# Altium PCB breakout.PcbDoc
Units mm, origin at the board's own origin, x right, y up, seen from the top; angles counter-clockwise.
Board outline 25.91 x 34.92 mm, 2 copper layers (Top Layer, Bottom Layer), stack 0.325 mm thick; 39 components, 49 nets, 215 pads, 52 vias.
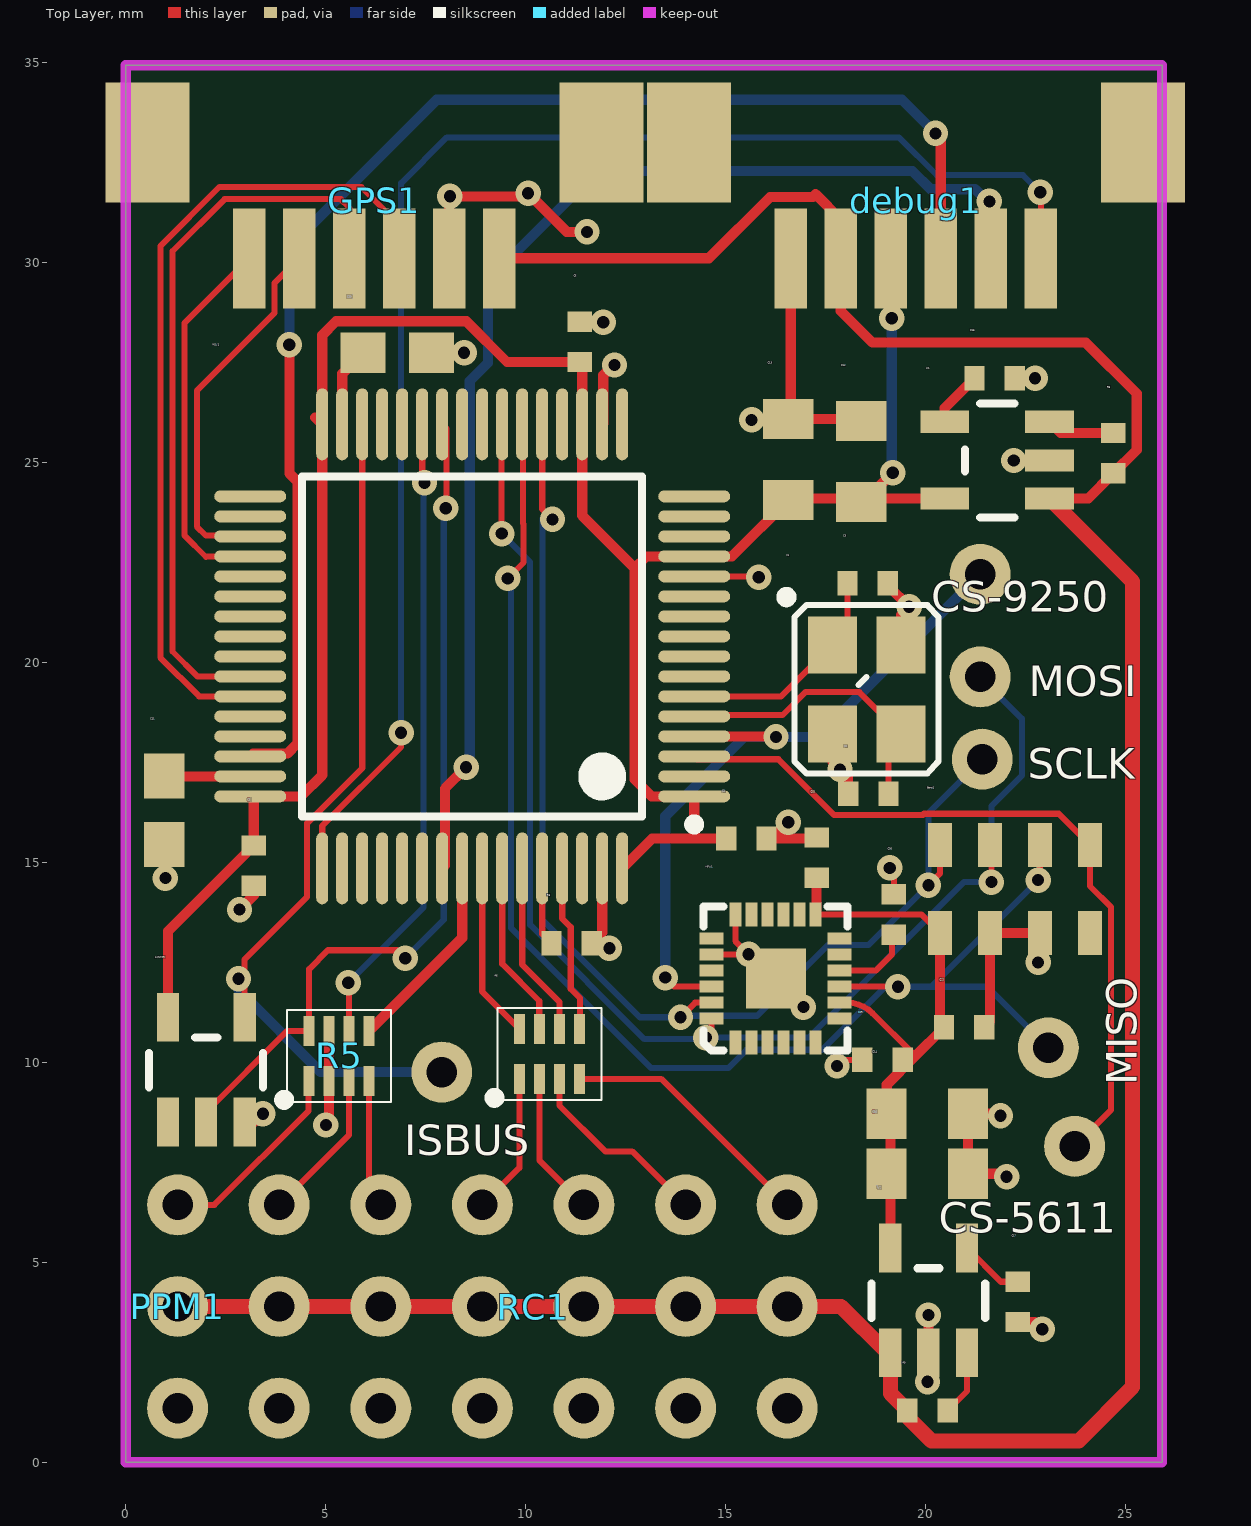
[diagram p0: Top Layer view]
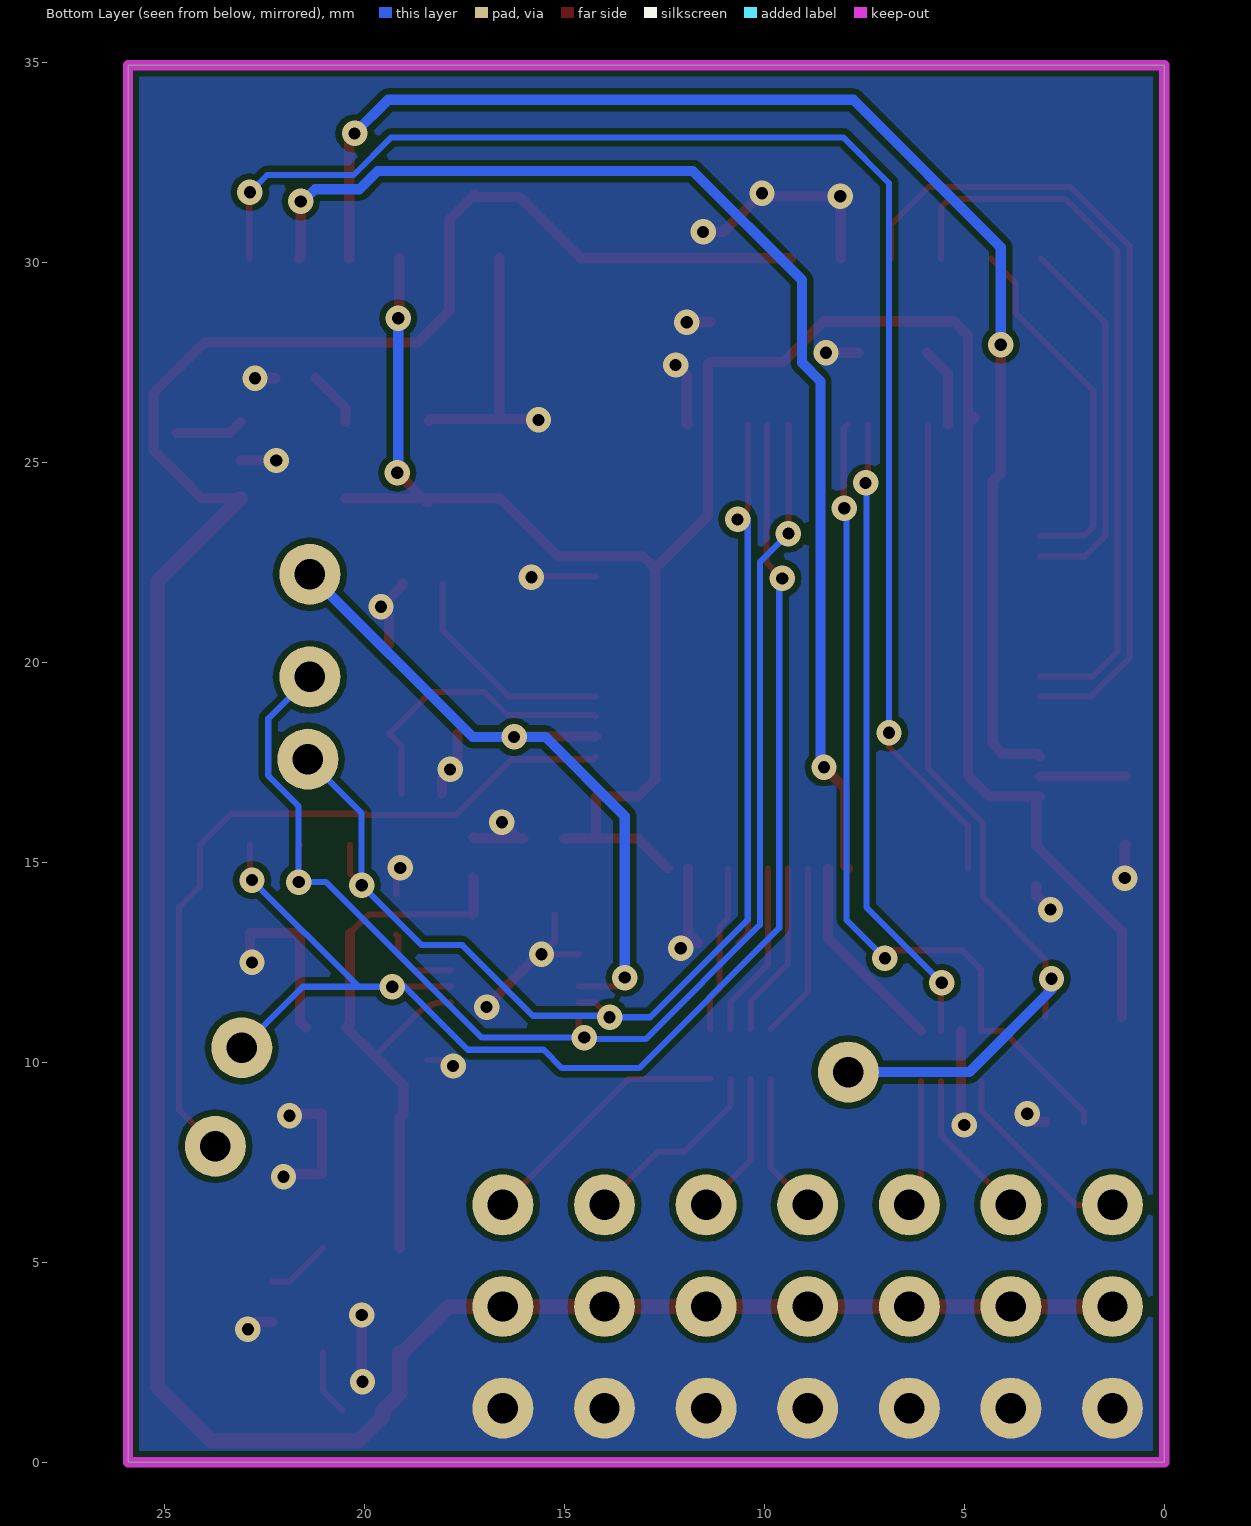
[diagram p1: Bottom Layer view, seen from below]

## Layer stack, top to bottom
Top Solder: solder mask 0.0102, Solder Resist, Dk 3.5
Top Layer: signal copper 0.0356
Dielectric 1: core 0.254, FR-4, Dk 4.2
Bottom Layer: signal copper 0.0356
Bottom Solder: solder mask 0.0102, Solder Resist, Dk 3.5

## Board outline
0,0 0,34.925 25.908,34.925 25.908,0

## Design rules (kind name [scope] priority, off if disabled: settings)
Clearance [All] p1: gap=0.152
DiffPairsRouting [All] p1: maxlimit=0.254 minlimit=0.254 mostfreqgap=0.254 toplayer_minwidth=0.152 toplayer_maxwidth=0.381 toplayer_prefwidth=0.381 bottomlayer_minwidth=0.152 bottomlayer_maxwidth=0.381 bottomlayer_prefwidth=0.381 maxuncoupledlength=12.7
MinimumSolderMaskSliver [All] p1 off: minsoldermaskwidth=0.254
PlaneConnect [All] p1: planeconnectstyle=Direct reliefexpansion=0.508 reliefentries=4 reliefconductorwidth=0.254 reliefairgap=0.254
PolygonConnect [All] p1: connectstyle=Direct reliefconductorwidth=0.254 reliefentries=4 polygonreliefangle="90 Angle" airgapwidth=0.254
RoomDefinition sensor [InComponentClass('sensor')] p1 off: confinementstyle=ConfineIn formatcopy=TRUE lockcomponents=FALSE outline -101.6,-52.07 -50.8,-52.07 -50.8,-26.67 -101.6,-26.67
RoomDefinition mcu [InComponentClass('mcu')] p2 off: confinementstyle=ConfineIn formatcopy=TRUE lockcomponents=FALSE outline -101.6,-52.07 -50.8,-52.07 -50.8,-26.67 -101.6,-26.67
RoutingVias [All] p1: holewidth=0.305 width=0.635 viastyle="Through Hole" minholewidth=0.305 minwidth=0.635 maxholewidth=0.711 maxwidth=5.08
SilkToBoardRegionClearance [All] p1 off:
SilkToSilkClearance [All] p1 off: silktosilkclearance=0.254
SilkToSolderMaskClearance [IsPad] p1 off: minsilkscreentomaskgap=0.254 clearancetoexposedcopper=TRUE
SolderMaskExpansion [All] p1: expansion=0.102
UnpouredPolygon [All] p1: allowunpoured=FALSE
Width [All] p1: maxlimit=2.159 minlimit=0.152 preferedwidth=0.152
23 further rules are at their usual default settings.

## Classes and differential pairs
component class sensor: Baro1 C12 C13 C14 C15 C16 C17 C27 C29 C30 C31 CS-5611 CS-9250 GPS1 MISO MOSI MPU1 R8 R9 SCLK U1 U2
component class mcu: C2 C3 C4 C5 C6 C10 C11 debug1 ISBUS MCU1 PPM1 R3 R5 R6 RC1 schmitt X1

## Components (designator, comment, footprint, x,y, rotation, side; value= is the part's Value field where it differs from the comment)
Baro1 "MS5611" MS5611 24.105,13.233 r90 top
C2 "22pF" 0402 18.567,16.713 r180 top
C3 "22pF" 0402 18.542,21.971 r0 top
C4 "0.1uF * 3" 0402 15.519,15.596 r180 top
C5 "1n" 0402 11.354,28.016 r270 top
C6 "1n" 0402 3.2,14.91 r90 top
C10 "2.2uF" 0603 6.782,27.737 r0 top
C11 "2.2uF" 0603 0.965,16.307 r270 top
C12 "22uF" 0805 18.39,25.019 r90 top
C13 "22uF" 0805 16.561,25.07 r90 top
C14 "22uF" 0805 20.041,8.712 r0 top
C15 "22uF" 0805 20.041,7.214 r0 top
C16 "0.1uf" 0402 21.717,27.102 r0 top
C17 "0.1uF" 0402 22.301,4.013 r270 top
C27 "0.1uF" 0402 20.955,10.871 r0 top
C29 "10nF" 0402 18.923,10.058 r180 top
C30 "0.1uF" 0402 19.202,13.69 r90 top
C31 "0.1uF" 0402 17.272,15.113 r90 top
CS-5611 "TestPad" TestPad 23.724,7.899 r90 top
CS-9250 "TestPad" TestPad 21.361,22.2 r90 top
debug1 "debug" WFRSM125 19.126,30.099 r180 top
GPS1 "GPS" WFRSM125 5.588,30.099 r180 top
ISBUS "TestPad" TestPad 7.899,9.754 r90 top
MCU1 "STM32F103R8T6" LQFP64_N 8.661,20.396 r180 top
MISO "TestPad" TestPad 23.063,10.363 r90 top
MOSI "TestPad" TestPad 21.361,19.634 r90 top
MPU1 "MPU9250" MPU9250 15.24,10.49 r90 top
PPM1 "PPMIn" ServoConnector 1.295,1.354 r90 top
R3 "10k" 0402 11.151,12.979 r180 top
R5 "Res*4" 0402X4 5.334,10.16 r90 top
R6 "Res*4" 0402X4 10.592,10.211 r90 top
R8 "10k" 0402 24.689,25.222 r90 top
R9 "10k" 0402 20.041,1.295 r0 top
RC1 "RC" 6P 8.915,1.354 r90 top
schmitt "schmitt_sot23-5" SOT23-5 2.007,9.804 r0 top
SCLK "TestPad" TestPad 21.412,17.577 r180 top
U1 "V_REG_LDOSMD" SOT23-5 21.793,25.044 r90 top
U2 "V_REG_LDOSMD" SOT23-5 20.066,4.039 r0 top
X1 "8mhz" OSCILLATOR-3.2X2.5 18.517,19.329 r270 top

## Footprints (in the part's own frame and the unit in brackets; to place one, negate y for a bottom-side part, rotate by r counter-clockwise, add the part's x,y. Pads: shape width x height; smd on the part's side, far side on the other; paste and mask are expansions set on the pad)
6P [mil]
  round 60 hole 30: 1(200,200) 2(200,100) 3(200,0) 4(200,-100) 5(200,-200) 5V(100,200) 5V(100,-100) 5V(100,0) 5V(100,100) 5V(100,-300) 5V(100,-200) 6(200,-300) GND(0,200) GND(0,100) GND(0,0) GND(0,-100) GND(0,-200) GND(0,-300)
0402 [mil] "0402-RES"
  rect 20x24 smd: 1(-19.69,0) 2(20,0)
0402X4 [mm]
  rect 0.75x0.28 smd: 1(-0.625,0.75) 2(-0.625,0.25) 3(-0.625,-0.25) 4(-0.625,-0.75) 5(0.625,-0.75) 6(0.625,-0.25) 7(0.625,0.25) 8(0.625,0.75)
  silkscreen extent -1.22,-1.3 1.15,1.5
0603 [mil] "0603-RES"
  rect 44x40 smd: 1(-33.46,0) 2(34,0)
0805 [mm]
  rect 1x1.27 smd: 1(-1.016,0) 2(1.016,0)
  body extent -1.27,-0.76 1.27,0.76, height 0.8
LQFP64_N [mm]
  oval 1.8x0.3 smd: 1(-5.55,3.75) 2(-5.55,3.25) 3(-5.55,2.75) 4(-5.55,2.25) 5(-5.55,1.75) 6(-5.55,1.25) 7(-5.55,0.75) 8(-5.55,0.25) 9(-5.55,-0.25) 10(-5.55,-0.75) 11(-5.55,-1.25) 12(-5.55,-1.75) 13(-5.55,-2.25) 14(-5.55,-2.75) 15(-5.55,-3.25) 16(-5.55,-3.75) 33(5.55,-3.75) 34(5.55,-3.25) 35(5.55,-2.75) 36(5.55,-2.25) 37(5.55,-1.75) 38(5.55,-1.25) 39(5.55,-0.75) 40(5.55,-0.25) 41(5.55,0.25) 42(5.55,0.75) 43(5.55,1.25) 44(5.55,1.75) 45(5.55,2.25) 46(5.55,2.75) 47(5.55,3.25) 48(5.55,3.75)
  oval 0.3x1.8 smd: 17(-3.75,-5.55) 18(-3.25,-5.55) 19(-2.75,-5.55) 20(-2.25,-5.55) 21(-1.75,-5.55) 22(-1.25,-5.55) 23(-0.75,-5.55) 24(-0.25,-5.55) 25(0.25,-5.55) 26(0.75,-5.55) 27(1.25,-5.55) 28(1.75,-5.55) 29(2.25,-5.55) 30(2.75,-5.55) 31(3.25,-5.55) 32(3.75,-5.55) 49(3.75,5.55) 50(3.25,5.55) 51(2.75,5.55) 52(2.25,5.55) 53(1.75,5.55) 54(1.25,5.55) 55(0.75,5.55) 56(0.25,5.55) 57(-0.25,5.55) 58(-0.75,5.55) 59(-1.25,5.55) 60(-1.75,5.55) 61(-2.25,5.55) 62(-2.75,5.55) 63(-3.25,5.55) 64(-3.75,5.55)
  silkscreen extent -5.68,-4.25 4.25,4.57
MPU9250 [mm]
  rect 1.5x1.5 smd: 0(1.6,-1.016)
  rect 0.6x0.3 smd: 1(0,0) 2(0,-0.4) 3(0,-0.8) 4(0,-1.2) 5(0,-1.6) 6(0,-2) 13(3.2,-2) 14(3.2,-1.6) 15(3.2,-1.2) 16(3.2,-0.8) 17(3.2,-0.4) 18(3.2,0)
  rect 0.3x0.6 smd: 7(0.6,-2.6) 8(1,-2.6) 9(1.4,-2.6) 10(1.8,-2.6) 11(2.2,-2.6) 12(2.6,-2.6) 19(2.6,0.6) 20(2.2,0.6) 21(1.8,0.6) 22(1.4,0.6) 23(1,0.6) 24(0.6,0.6)
  silkscreen extent -0.2,-2.8 3.4,0.8, body extent 0.1,-2.51 3.1,0.48, height 1
MS5611 [mm]
  rect 1.1x0.6 smd: 1(0,3.75) 2(0,2.5) 3(0,1.25) 4(0,0) 5(2.2,0) 6(2.2,1.25) 7(2.2,2.5) 8(2.2,3.75)
  body extent -0.51,-0.51 2.67,4.32, height 1
OSCILLATOR-3.2X2.5 [mil] "OSCILLATOR-3.2X2.5"
  rect 56x48 smd: 1(-43.31,-33.46) 2(44,-33.46) 3(44,34) 4(-43.31,34)
  silkscreen extent -95,-83 83,71
ServoConnector [mil]
  round 60 hole 30: 1(0,0) 2(100,0) 3(200,0)
SOT23-5 [mil] "SOT23-5"
  rect 22x48 smd: 1(-37.4,-51.18) 2(0,-51.18) 3(38,-51.18) 4(38,52) 5(-37.4,52)
  silkscreen extent -56,-17 56,32
TestPad [mil]
  round 60 hole 30: 1(0,0)
WFRSM125 [mm]
  rect 0.81x2.5 smd: 1(-3.75,0) 2(-2.5,0) 3(-1.25,0) 4(0,0) 5(1.25,0) 6(2.5,0)
  rect 2.1x3 smd: shell(-6.3,-2.9) shell(5.05,-2.9)
  body extent -6.79,-3.82 5.46,0.38, height 3.4

## Part data
C2 C3 C4 C5 C6 C10 C11 C12 C13 C14 C15 C16 C17 C27 C29 C30 C31: library part CAP0402-CAP, "<b>Capacitor</b> / Standard 0603 ceramic capacitor, and 0.1\" leaded capacitor."
MCU1: "STM32 ARM-based 32-bit MCU with 64 Kbytes Flash, 64-pin LQFP, Industrial Temperature"
R3: library part Res2, "Resistor"
R5 R6: "Resistor"
R8 R9: library part RESISTOR0402-RES, "<b>Resistor</b> / Basic schematic elements and footprints for 0603, 1206, and PTH resistors."
U1 U2: "<b>Voltage Regulator LDO</b> / Standard 150mA LDO voltage regulator in SOT-23 layout. Micrel part MIC5205. BP (by-pass) pin is used to lower output noise with 470pF cap."
X1: library part OSCILLATOR-3.2X2.5, "Crystal Oscillator in 3.2x2.5 SMD"

## Via types
v1: diameter 0.635, hole 0.305, Top Layer to Bottom Layer, 52 vias

## Nets (pads, with @x,y where several pads share a name; then routed paths per layer and width w, separated by ;. In a path a pad name is that pad's centre, name@x,y a point inside that pad or via, vN(x,y) a via of type N, cw(c..) or ccw(c..) an arc to the next point about the centre after c; other vN are vias at no path point)
3.3A: Baro1.1 C14.1 C15.1 C27.1 C29.1 C31.1 MPU1.8 MPU1.13 U2.5 | length 15.2
  Top Layer w0.152: MPU1.13@17.269,13.69 19.898,13.69 Baro1.1 ; MPU1.8 18.033,11.49 cw(c18.033,10.591) 18.669,11.227 19.688,10.208 cw(c19.615,10.135) 19.718,10.135
  Top Layer w0.254: MPU1.13@17.269,13.69 17.272,13.693 C31.1 ; U2.5 19.116,8.621 C14.1 19.025,9.441 19.718,10.135 C27.1 20.355,10.972 Baro1.1
3.3D: C4.2 C5.2 C6.2 C12.1 C13.1 debug1.4 MCU1.1 MCU1.13 MCU1.19 MCU1.32 MCU1.48 MCU1.64 schmitt.5 U1.5 | length 58.3
  Top Layer w0.254: schmitt.5 1.057,13.274 C6.2 3.2,16.557 MCU1.48 4.378,16.646 4.911,17.18 MCU1.32 ; 4.738,26.119 MCU1.32 ; MCU1.64 13.161,15.596 14.3,15.596 ; C4.2 14.3,15.596 ; C12.1 18.44,24.003 C12.1@18.532,24.094 ; debug1.4 19.126,28.626 v1(19.152,28.6) ; v1(19.177,24.74) C12.1@18.532,24.094 ; U1.5 C12.1@18.532,24.094 ; MCU1.32 4.911,28.178 5.257,28.524 8.515,28.524 9.531,27.508 C5.2 11.411,27.451 MCU1.19 11.411,23.666 12.725,22.352 ; 12.725,22.352 13.02,22.646 MCU1.13 15.153,22.646 C13.1 16.601,24.094 C12.1@18.532,24.094 ; 12.725,22.352 12.725,17.069 13.148,16.646 MCU1.1 14.211,15.684 14.3,15.596
  Bottom Layer w0.254: v1(19.152,28.6) 19.152,24.765 v1(19.177,24.74)
5V: debug1.5 GPS1.1 PPM1.2 R8.1 R9.1 RC1.5V U1.1 U2.1 | length 73.7
  Top Layer w0.254: GPS1.1 14.576,30.099 16.105,31.628 17.176,31.628 17.247,31.699 17.876,31.07 debug1.5 17.876,28.784 18.669,27.991 24.003,27.991 25.273,26.721 25.273,25.306 R8.1 24.061,24.094 U1.1
  Top Layer w0.381: PPM1.2 3.835,3.894 6.375,3.894 8.915,3.894 11.455,3.894 13.995,3.894 16.535,3.894 17.884,3.894 19.04,2.739 U2.1 19.116,1.72 R9.1 19.541,1.135 20.142,0.533 23.825,0.533 25.171,1.88 25.171,22.016 U1.1
GND: Baro1.2 Baro1.3 C2.2 C3.2 C4.1 C5.1 C6.1 C10.2 C11.2 C12.2 C13.2 C14.2 C15.2 C16.2 C17.2 C27.2 C29.2 C30.2 C31.2 debug1.6 GPS1.2 MCU1.12 MCU1.18 MCU1.63 MPU1.0 MPU1.18 MPU1.20 PPM1.1 R3.1 R5.2 R5.7 RC1.GND schmitt.3 U1.2 U2.2 X1.2 X1.4 | length 46.8
  Top Layer w0.152: MCU1.12 15.801,22.146 v1(15.824,22.123) ; MPU1.20 15.56,12.69 v1(15.57,12.7) 15.24,13.03 MPU1.18 ; v1(17.78,9.906) 17.932,10.058 C29.2 ; v1(19.101,14.859) 19.202,14.757 C30.2
  Top Layer w0.254: C11.2 0.991,15.418 v1(0.991,14.605) ; v1(2.845,13.818) 3.2,14.173 C6.1 ; schmitt.3 3.221,8.504 v1(3.429,8.712) ; v1(5.004,8.433) 5.084,8.513 R5.2 R5.7 ; C10.2 v1(8.458,27.737) ; GPS1.2 8.088,31.634 v1(8.103,31.648) 9.982,31.648 v1(10.058,31.725) 11.024,30.759 v1(11.532,30.759) ; MCU1.63 11.911,13.24 R3.1 11.963,12.979 v1(12.09,12.852) ; MCU1.18 11.938,25.973 11.938,27.178 12.192,27.432 v1(12.217,27.432) ; v1(15.57,12.7) 15.646,12.7 MPU1.0 16.942,11.405 v1(16.942,11.379) ; v1(15.646,26.06) 15.672,26.086 C13.2 ; C4.1 C4.1@16.154,15.596 ; v1(16.561,16.002) C4.1@16.154,15.596 ; debug1.6 16.626,26.151 C13.2 ; C31.2 17.247,15.596 C4.1@16.154,15.596 ; X1.2 17.667,17.512 v1(17.856,17.323) 18.059,17.12 C2.2 ; C12.2 18.339,26.086 C13.2 ; C3.2 19.05,21.92 v1(19.583,21.387) 19.38,21.184 X1.4 ; v1(20.045,2.015) 20.045,2.002 20.066,2.002 U2.2 v1(20.066,3.683) ; C27.2 21.605,11.013 Baro1.2 Baro1.3 22.855,12.542 v1(22.809,12.497) ; v1(21.869,8.661) 21.819,8.712 C14.2 C15.2 21.946,7.214 v1(22.022,7.137) ; v1(22.2,25.044) U1.2 ; C16.2 v1(22.733,27.102) ; C17.2 22.733,3.505 v1(22.911,3.327) ; C5.1 11.371,28.499 v1(11.938,28.499) 11.921,28.516 C5.1
NetBaro1_5: Baro1.5 CS-5611.1 MCU1.3 | length 19
  Top Layer w0.152: MCU1.3 14.281,17.577 16.314,17.577 17.711,16.18 19.928,16.18 19.96,16.212 23.326,16.212 Baro1.5 24.105,14.407 24.633,13.878 24.633,8.809 CS-5611.1
NetBaro1_6: Baro1.6 MCU1.22 MISO.1 MPU1.9 | length 35.3
  Top Layer w0.152: v1(9.55,22.098) 9.944,22.492 9.944,23.455 9.931,23.467 9.931,25.926 MCU1.22 ; MPU1.9 19.301,11.89 v1(19.304,11.887) ; v1(22.809,14.554) 22.855,14.6 Baro1.6
  Bottom Layer w0.152: v1(9.55,22.098) 9.627,22.022 9.627,13.36 13.132,9.855 15.062,9.855 15.519,10.312 17.414,10.312 18.989,11.887 v1(19.304,11.887) 20.142,11.887 ; v1(22.809,14.554) 20.142,11.887 ; MISO.1 21.539,11.887 20.142,11.887
NetBaro1_7: Baro1.7 MCU1.23 MOSI.1 MPU1.24 | length 34.5
  Top Layer w0.152: v1(9.398,23.216) 9.398,25.933 MCU1.23 ; v1(14.503,10.617) 14.64,10.754 MPU1.24 ; Baro1.7 21.641,15.397 v1(21.641,14.503)
  Bottom Layer w0.152: v1(9.398,23.216) 10.109,22.504 10.109,13.437 12.967,10.579 14.465,10.579 v1(14.503,10.617) 17.069,10.617 20.955,14.503 v1(21.641,14.503) 21.641,16.404 22.403,17.166 22.403,18.593 MOSI.1
NetBaro1_8: Baro1.8 MCU1.21 MPU1.23 SCLK.1 | length 30.6
  Top Layer w0.152: MCU1.21 10.411,23.828 v1(10.668,23.571) ; v1(13.868,11.125) 14.233,11.49 MPU1.23 ; v1(20.066,14.427) 20.355,14.716 Baro1.8
  Bottom Layer w0.152: v1(10.668,23.571) 10.439,23.571 10.414,23.597 10.414,13.564 12.852,11.125 v1(13.868,11.125) 13.907,11.163 15.786,11.163 17.551,12.929 18.567,12.929 v1(20.066,14.427) 20.066,16.231 SCLK.1
NetC2_1: C2.1 MCU1.5 X1.3 | length 7.5
  Top Layer w0.152: MCU1.5 14.247,18.682 16.421,18.682 16.993,19.253 18.339,19.253 X1.3 19.067,17.899 C2.1
NetC3_1: C3.1 MCU1.6 X1.1 | length 5.7
  Top Layer w0.152: MCU1.6 16.383,19.146 X1.1 18.042,20.805 C3.1
NetC10_1: C10.1 MCU1.31 | length 2
  Top Layer w0.254: MCU1.31 5.411,27.216 C10.1
NetC11_1: C11.1 MCU1.47 | length 2.2
  Top Layer w0.254: C11.1 0.976,17.146 MCU1.47
NetC16_1: C16.1 U1.4 | length 1.4
  Top Layer w0.254: U1.4 20.472,26.357 C16.1
NetC17_1: C17.1 U2.4 | length 1.6
  Top Layer w0.152: U2.4 21.877,4.513 C17.1
NetC30_1: C30.1 MPU1.10 | length 2
  Top Layer w0.152: MPU1.10 18.75,12.29 19.152,12.692 19.152,13.139 C30.1
NetCS-9250_1: CS-9250.1 MCU1.4 MPU1.22 | length 17.7
  Top Layer w0.152: v1(13.487,12.116) 13.713,11.89 MPU1.22
  Top Layer w0.254: MCU1.4 16.245,18.146 v1(16.256,18.136)
  Bottom Layer w0.254: v1(13.487,12.116) 13.487,16.154 15.469,18.136 v1(16.256,18.136) 17.297,18.136 CS-9250.1
Netdebug1_1: debug1.1 MCU1.49 | length 36.6
  Top Layer w0.152: MCU1.49 4.911,15.91 6.883,17.882 v1(6.883,18.237) ; v1(22.86,31.75) 22.876,31.734 debug1.1
  Bottom Layer w0.152: v1(6.883,18.237) 6.883,31.979 8.026,33.122 19.329,33.122 20.269,32.182 22.428,32.182 v1(22.86,31.75)
Netdebug1_2: debug1.2 MCU1.55 | length 30.7
  Top Layer w0.254: MCU1.55 7.982,14.917 7.982,16.847 v1(8.509,17.374) ; v1(21.59,31.521) 21.59,30.135 debug1.2
  Bottom Layer w0.254: v1(8.509,17.374) 8.598,17.463 8.598,27.032 9.055,27.49 9.055,29.553 11.786,32.283 19.665,32.283 20.122,31.826 21.234,31.826 21.59,31.471 v1(21.59,31.521)
Netdebug1_3: debug1.3 MCU1.46 | length 35
  Top Layer w0.254: MCU1.46 3.182,17.717 4.039,17.717 4.291,17.968 4.291,24.525 4.089,24.727 v1(4.089,27.94) ; v1(20.244,33.223) 20.376,33.091 debug1.3
  Bottom Layer w0.254: v1(4.089,27.94) 4.089,30.378 7.772,34.061 19.406,34.061 v1(20.244,33.223)
NetGPS1_3: GPS1.3 MCU1.43 | length 20.7
  Top Layer w0.152: MCU1.43 1.834,19.146 0.864,20.117 0.864,30.403 2.343,31.882 5.887,31.882 6.838,30.932 GPS1.3
NetGPS1_4: GPS1.4 MCU1.42 | length 18.5
  Top Layer w0.152: MCU1.42 1.791,19.646 1.168,20.269 1.168,30.277 2.469,31.578 5.379,31.578 5.588,31.369 GPS1.4
NetGPS1_5: GPS1.5 MCU1.35 | length 9.2
  Top Layer w0.152: MCU1.35 3.093,23.165 2.007,23.165 1.778,23.393 1.778,26.79 3.722,28.734 3.722,29.483 GPS1.5
NetGPS1_6: GPS1.6 MCU1.36 | length 9.5
  Top Layer w0.152: GPS1.6 1.473,28.484 1.473,23.165 2.007,22.631 2.021,22.646 MCU1.36
NetISBUS_1: ISBUS.1 MCU1.30 schmitt.4 | length 22.3
  Top Layer w0.152: schmitt.4 2.972,12.573 4.533,14.134 4.533,15.975 5.911,17.353 MCU1.30
  Bottom Layer w0.254: v1(2.819,12.09) 2.819,11.811 4.877,9.754 ISBUS.1
NetMCU1_26: MCU1.26 R5.8 schmitt.2 | length 21.7
  Top Layer w0.152: schmitt.2 2.007,8.751 4.04,10.785 R5.8 4.584,12.331 5.055,12.802 6.782,12.802 v1(6.985,12.598) ; MCU1.26 8.014,25.844 8.014,23.863 v1(8.001,23.851)
  Bottom Layer w0.152: v1(6.985,12.598) 7.95,13.564 7.95,23.851 v1(8.001,23.851)
NetMCU1_27: MCU1.27 R5.6 | length 16
  Top Layer w0.152: v1(5.563,11.989) 5.584,11.967 R5.6 ; MCU1.27 7.411,24.542 v1(7.468,24.486)
  Bottom Layer w0.152: v1(5.563,11.989) 7.442,13.868 7.442,24.511 v1(7.468,24.486)
NetMCU1_39: MCU1.39
NetMCU1_40: MCU1.40
NetMCU1_44: MCU1.44
NetMCU1_45: MCU1.45
NetMCU1_51: MCU1.51
NetMCU1_52: MCU1.52
NetMCU1_53: MCU1.53
NetMCU1_54: MCU1.54
NetMCU1_56: MCU1.56 R5.5 | length 5
  Top Layer w0.254: R5.5 8.411,13.112 MCU1.56
NetMCU1_57: MCU1.57 R6.8 | length 4.4
  Top Layer w0.152: MCU1.57 8.911,11.766 R6.8
NetMCU1_58: MCU1.58 R6.7 | length 4.4
  Top Layer w0.152: MCU1.58 9.411,12.458 10.338,11.532 10.338,10.84 R6.7
NetMCU1_59: MCU1.59 R6.6 | length 4.4
  Top Layer w0.152: MCU1.59 9.911,12.441 10.846,11.506 10.846,10.84 R6.6
NetMCU1_60: MCU1.60 R3.2 | length 2
  Top Layer w0.152: MCU1.60 10.411,13.211 R3.2
NetMCU1_61: MCU1.61 R6.5 | length 4.2
  Top Layer w0.152: MCU1.61 10.911,13.593 11.125,13.379 11.125,11.836 11.354,11.608 11.354,10.848 R6.5
NetPPM1_3: PPM1.3 R5.1 | length 5
  Top Layer w0.152: PPM1.3 2.218,6.434 4.572,8.788 4.572,9.523 R5.1
NetR5_3: R5.3 RC1.1 | length 3.8
  Top Layer w0.152: RC1.1 5.584,8.183 R5.3
NetR5_4: R5.4 RC1.2 | length 3.2
  Top Layer w0.152: R5.4 6.084,6.726 RC1.2
NetR6_1: R6.1 RC1.3 | length 3.5
  Top Layer w0.152: RC1.3 9.842,7.361 R6.1
NetR6_2: R6.2 RC1.4 | length 3.6
  Top Layer w0.152: R6.2 10.342,7.548 RC1.4
NetR6_3: R6.3 RC1.5 | length 4.8
  Top Layer w0.152: R6.3 10.842,8.919 11.989,7.772 12.657,7.772 RC1.5
NetR6_4: R6.4 RC1.6 | length 6.5
  Top Layer w0.152: R6.4 13.384,9.586 RC1.6
NetR8_2: R8.2 U1.3 | length 1.7
  Top Layer w0.254: U1.3 23.373,25.73 R8.2
NetR9_2: R9.2 U2.3 | length 1.6
  Top Layer w0.152: R9.2 21.031,1.778 U2.3
pads on no net: Baro1.4 debug1.shell GPS1.shell MCU1.2 MCU1.7 MCU1.8 MCU1.9 MCU1.10 MCU1.11 MCU1.14 MCU1.15 MCU1.16 MCU1.17 MCU1.20 MCU1.24 MCU1.25 MCU1.28 MCU1.29 MCU1.33 MCU1.34 MCU1.37 MCU1.38 MCU1.41 MCU1.50 MCU1.62 MPU1.1 MPU1.2 MPU1.3 MPU1.4 MPU1.5 MPU1.6 MPU1.7 MPU1.11 MPU1.12 MPU1.14 MPU1.15 MPU1.16 MPU1.17 MPU1.19 MPU1.21 schmitt.1

## Polygon pours and split planes (outlines as drawn)
GND on Bottom Layer "Top Layer-No Net" (solid, remove dead copper, pour order 6): -0.838,35.382 26.848,35.382 26.848,-1.168 26.721,-1.295 26.645,-1.372 -1.194,-1.372

## Keep-outs
Keep-Out Layer:
  the board outline again, w0.254

## Text inside footprints (layer, text, board x,y; h text height)
R5: Mechanical 1 "R1" at 5.533,10.34 h0.03 r180
R6: Mechanical 1 "R1" at 10.791,10.391 h0.03 r180